# Altium PCB PCB1.PcbDoc
Units mil, origin at the board's own origin, x right, y up, seen from the top; angles counter-clockwise.
Board outline 2000 x 1995 mil, 2 copper layers (Top Layer, Bottom Layer); 25 components, 8 nets, 53 pads, 0 vias.
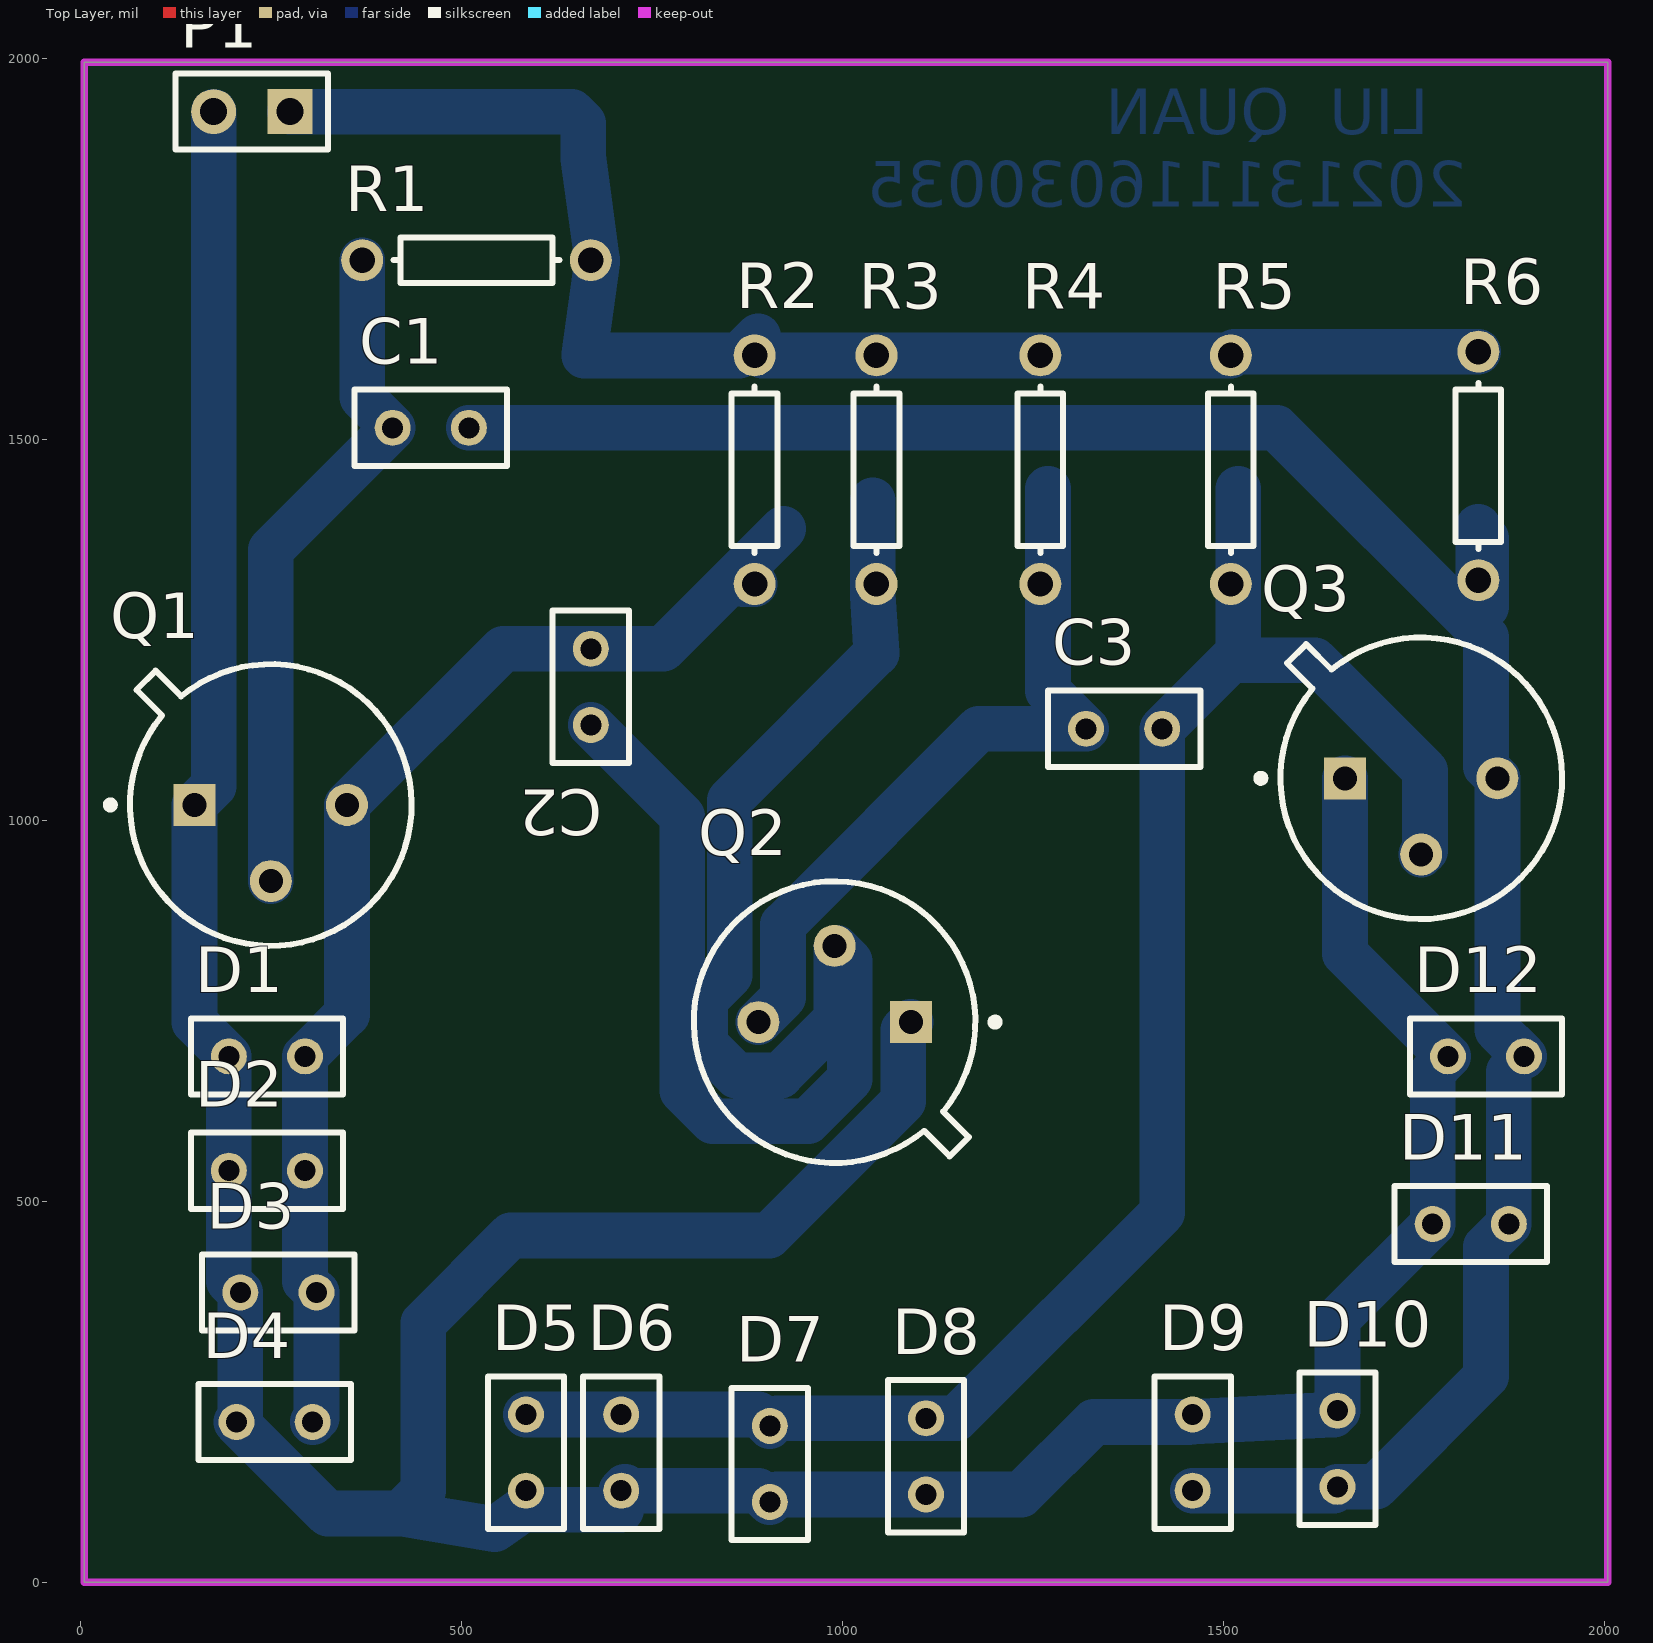
[diagram p0: Top Layer view]
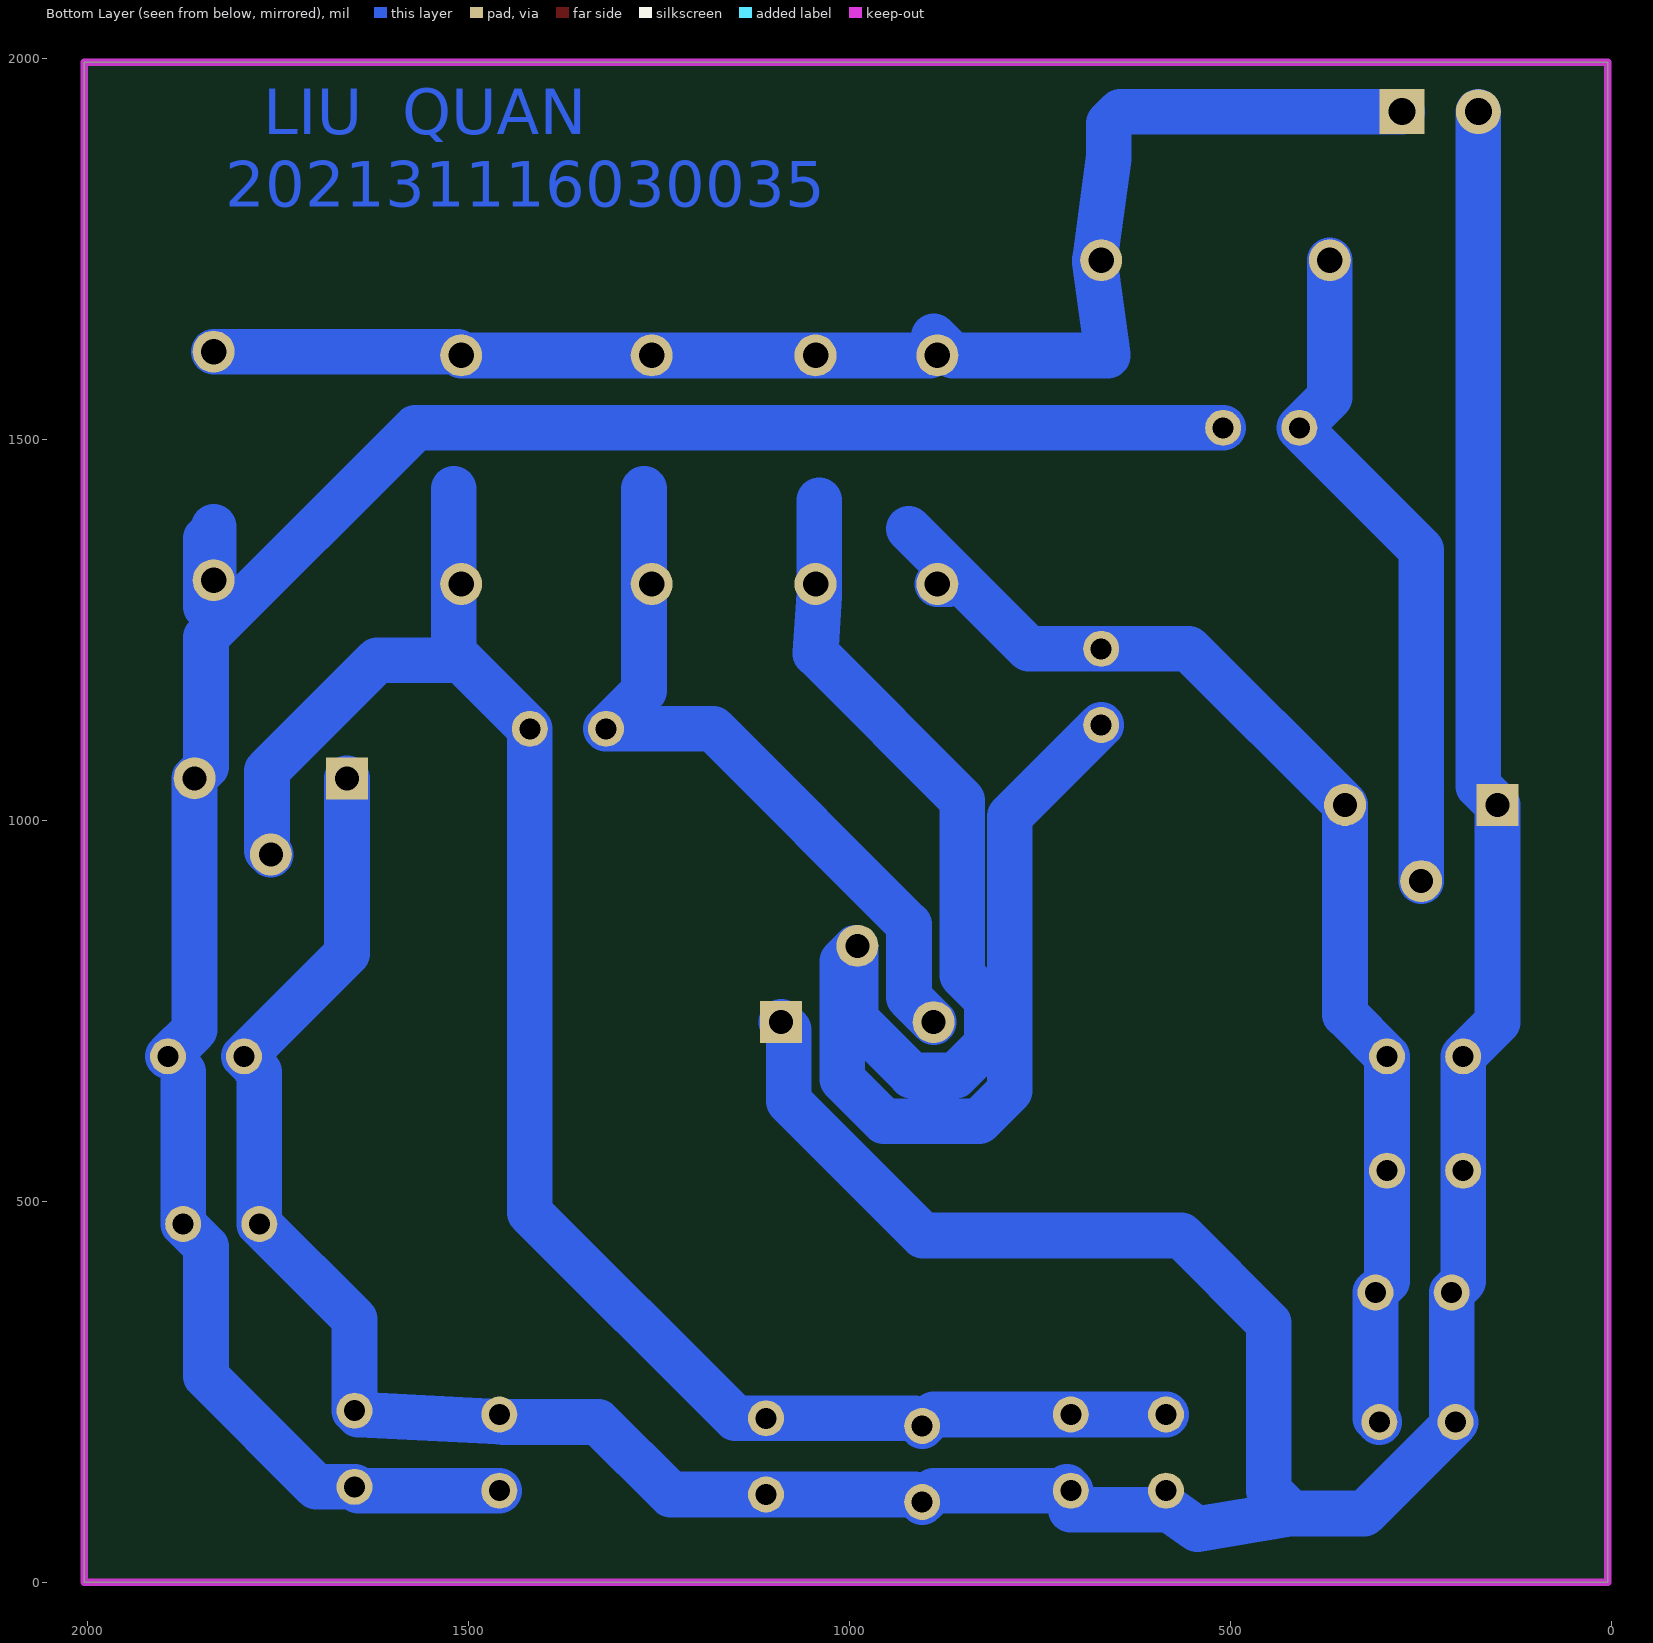
[diagram p1: Bottom Layer view, seen from below]

## Layer stack, top to bottom
Top Solder: solder mask 0.4, Solder Resist, Dk 3.5
Top Layer: signal copper 1.4
Dielectric 1: dielectric 12.6, FR-4, Dk 4.8
Bottom Layer: signal copper 1.4
Bottom Solder: solder mask 0.4, Solder Resist, Dk 3.5

## Board outline
5,0 5,1980 5,1995 2005,1995 2005,0

## Design rules (kind name [scope] priority, off if disabled: settings)
Clearance [All] p1: gap=10 ignorepadtopadclearanceinfootprint=FALSE except(0: Arc-Hole Track-Hole SMDPad-Hole THPad-Hole Via-Hole Fill-Hole Poly-Hole Region-Hole Text-Hole)
PolygonConnect [All] p1: connectstyle=Relief reliefconductorwidth=10 reliefentries=4 polygonreliefangle="90 Angle" airgapwidth=10
RoutingVias [All] p1: holewidth=28 width=50 viastyle="Through Hole" minholewidth=28 minwidth=50 maxholewidth=28 maxwidth=50
SolderMaskExpansion [All] p1: expansion=4
Width [All] p1: maxlimit=80 minlimit=40 preferedwidth=60
30 further rules are at their usual default settings.

## Components (designator, comment, footprint, x,y, rotation, side; value= is the part's Value field where it differs from the comment)
C1 "Cap Pol1" RAD-0.1 460,1515 r180 top value=100u
C2 "Cap Pol1" RAD-0.1 670,1175 r270 top value=100u
C3 "Cap Pol1" RAD-0.1 1370,1120 r0 top value=100u
D1 "LED0" RAD-0.1 245,690 r180 top
D2 "LED0" RAD-0.1 245,540 r180 top
D3 "LED0" RAD-0.1 260,380 r180 top
D4 "LED0" RAD-0.1 255,210 r180 top
D5 "LED0" RAD-0.1 585,170 r270 top
D6 "LED0" RAD-0.1 710,170 r270 top
D7 "LED0" RAD-0.1 905,155 r270 top
D8 "LED0" RAD-0.1 1110,165 r270 top
D9 "LED0" RAD-0.1 1460,170 r90 top
D10 "LED0" RAD-0.1 1650,175 r90 top
D11 "LED0" RAD-0.1 1825,470 r180 top
D12 "LED0" RAD-0.1 1845,690 r180 top
P1 "Header 2" HDR1X2 275,1930 r180 top
Q1 "2N2222" TO-39 250,1020 r0 top
Q2 "2N2222" TO-39 990,735 r180 top
Q3 "2N2222" TO-39 1760,1055 r0 top
R1 "Res1" AXIAL-0.3 520,1735 r0 top value=4.7K
R2 "Res1" AXIAL-0.3 885,1460 r90 top value=200
R3 "Res1" AXIAL-0.3 1045,1460 r90 top value=4.7K
R4 "Res1" AXIAL-0.3 1260,1460 r90 top value=200
R5 "Res1" AXIAL-0.3 1510,1460 r90 top value=4.7K
R6 "Res1" AXIAL-0.3 1835,1465 r90 top value=200

## Footprints (in the part's own frame and the unit in brackets; to place one, negate y for a bottom-side part, rotate by r counter-clockwise, add the part's x,y. Pads: shape width x height; smd on the part's side, far side on the other; paste and mask are expansions set on the pad)
AXIAL-0.3 [mm] "Axial Device, Thru-Hole; 2 Leads; 0.3 in Pin Spacing"
  round 1.4 hole 0.85: 1(-3.81,0) 2(3.81,0)
  silkscreen extent -2.77,-0.76 2.77,0.76
HDR1X2 [mm] "Connector; Header; 2 Position"
  rect 1.5x1.5 hole 0.9: 1(0,0)
  round 1.5 hole 0.9: 2(2.54,0)
  silkscreen extent -1.27,-1.27 3.81,1.27
RAD-0.1 [mm] "Radial Cap, Thru-Hole; 2 Leads; 0.1 in Pin Spacing"
  round 1.2 hole 0.7: 1(-1.27,0) 2(1.27,0)
  silkscreen extent -2.54,-1.27 2.54,1.27
TO-39 [mm] "Can; 3 Leads; Pin Circle Dia. 5.08 mm; Lead Dia. 0.48 mm (max)"
  rect 1.4x1.4 hole 0.8: 1(-2.54,0)
  round 1.4 hole 0.8: 2(0,-2.54) 3(2.54,0)
  silkscreen extent -5.47,-4.69 4.69,4.69, body extent -4.69,-4.69 4.69,4.69, height 4.55

## Part data
C1 C2 C3: "Polarized Capacitor (Radial)", LatestRevisionDate=17-Jul-2002, LatestRevisionNote="Re-released for DXP Platform.", PackageDescription="Polarized Capacitor (Radial); 2 Leads", PackageReference=RB7.6-15, Published=8-Jun-2000, Publisher="Altium Limited"
D1 D2 D3 D4 D5 D6 D7 D8 D9 D10 D11 D12: "Typical INFRARED GaAs LED", LatestRevisionDate=08-Jul-2005, LatestRevisionNote="Mech Layer 1 removed.", PackageDescription="LED; 2 Leads", PackageReference=LED-0, Published=8-Jun-2000, Publisher="Altium Limited"
P1: "Header, 2-Pin", LatestRevisionDate=17-Jul-2002, LatestRevisionNote="Re-released for DXP Platform.", Publisher="Altium Limited"
Q1 Q2 Q3: library part 2N3904, "NPN General Purpose Amplifier", ComponentLink1Description="Manufacturer Link", ComponentLink1URL=http://www.fairchildsemi.com/, ComponentLink2Description=Datasheet, ComponentLink2URL=http://www.fairchildsemi.com/ds/2N%2F2N3904.pdf, DatasheetVersion=1997, LatestRevisionDate=15-Jan-2003, LatestRevisionNote="PCB Footprint 'BCY-W3/D4.7' replaced", PackageDescription="TO, Flat Index; 3 In-Line, Axial Leads; Body Dia. 4.5mm; Leads 0.51 x 0.48 mm (max)", PackageReference=TO-92A, PackageVersion=Sep-1998, Published=8-Jun-2000, Publisher="Altium Limited"
R1 R2 R3 R4 R5 R6: "Resistor", LatestRevisionDate=17-Jul-2002, LatestRevisionNote="Re-released for DXP Platform.", PackageDescription="Axial Device, Thru-Hole; 2 Leads; 0.3 in Pin Spacing", PackageReference=AXIAL-0.3, Published=8-Jun-2000, Publisher="Altium Limited"

## Nets (pads, with @x,y where several pads share a name; then routed paths per layer and width w, separated by ;. In a path a pad name is that pad's centre, name@x,y a point inside that pad or via, vN(x,y) a via of type N, cw(c..) or ccw(c..) an arc to the next point about the centre after c; other vN are vias at no path point)
GND: D1.2 D2.2 D3.2 D4.2 D5.2 D6.2 D7.2 D8.2 D9.2 D10.2 D11.2 D12.2 P1.2 Q1.1 Q2.1 Q3.1 | length 5411.7
  Bottom Layer w60: P1.2 175,1045 Q1.1 150,735 D1.2 D2.2 195,395 D3.2 210,215 D4.2 325,90 420,90 ; D6.2 D6.2@714.17,120 ; D6.2@715,125 D6.2@714.17,120 ; Q2.1 1080,725 1080,631.01 903.99,455 565,455 450,340 450,120 420,90 ; Q3.1 1660,825 D12.2 1775,670 D11.2 1650,345 D10.2 1645,220 1460.51,210.29 1455,210 1330,210 1235,115 D8.2 915,115 D7.2 890,120 D6.2@714.17,120 ; 420,90 544.05,69.32 580.95,95.68 585,95 710,95 714.05,119.32 D6.2@714.17,120
NetC1_1: C1.1 D9.1 D10.1 D11.1 D12.1 Q3.3 R6.1 | length 3039.2
  Bottom Layer w60: C1.1 1570,1515 1845,1240 1845,1070 Q3.3 1860,725 D12.1 ; D9.1 1645,120 D10.1 1700,125 1845,270 1845,440 D11.1 1875,670 ; R6.1 1835,1385 ; 1845,1280 1845,1370
NetC1_2: C1.2 Q1.2 R1.1 | length 897.8
  Bottom Layer w60: Q1.2 250,1355 C1.2 370,1555 R1.1
NetC2_1: C2.1 D1.1 D2.1 D3.1 D4.1 Q1.3 R2.1 | length 1578.7
  Bottom Layer w60: D4.1 310,215 D3.1 295,395 D2.1 D1.1 350,745 Q1.3 555,1225 C2.1 765,1225 922.5,1382.5 ; R2.1@870,1310 R2.1
NetC2_2: C2.2 Q2.2 R3.1 | length 2090.2
  Bottom Layer w60: C2.2 790,1005 790,645 830,605 955,605 1010,660 1010,815 992.44,832.56 992.44,738.45 918.99,665 861.01,665 820,706.01 820,763.99 852.44,796.44 852.44,1026.28 1045,1218.84 1040,1295 1040,1420
NetC3_1: C3.1 Q2.3 R4.1 | length 981.2
  Bottom Layer w60: Q2.3 922.44,767.44 922.44,862.98 1179.46,1120 C3.1 1270,1170 1270,1435
NetC3_2: C3.2 D5.1 D6.1 D7.1 D8.1 Q3.2 R5.1 | length 2375.7
  Bottom Layer w60: D5.1 D6.1 890,220 D7.1 915,215 D8.1 1150,215 1420,485 C3.2 1510,1210 ; 1520,1435 1520,1220 1510,1210 ; Q3.2 1765,960 1765,1065 1620,1210 1510,1210
VCC: P1.1 R1.2 R2.2 R3.2 R4.2 R5.2 R6.2 | length 1879.4
  Bottom Layer w60: P1.1 644.85,1930 660,1914.85 660,1869.35 678.17,1736.11 678.48,1733.84 661.59,1610 865,1610 R2.2@890,1635 ; R2.2@895,1610 R3.2 R4.2 R5.2 1515,1615 R6.2

## Keep-outs
Keep-Out Layer:
  the board outline again, w10

## Other copper
Bottom Layer:
  text "LIU  QUAN" at 1770,1900 h60
  text "202131116030035" at 1820,1805 h60